# Allegro board PCB_SQ_WAVE_GEN1_BACKUP_cu_plan_masa_v1.brd
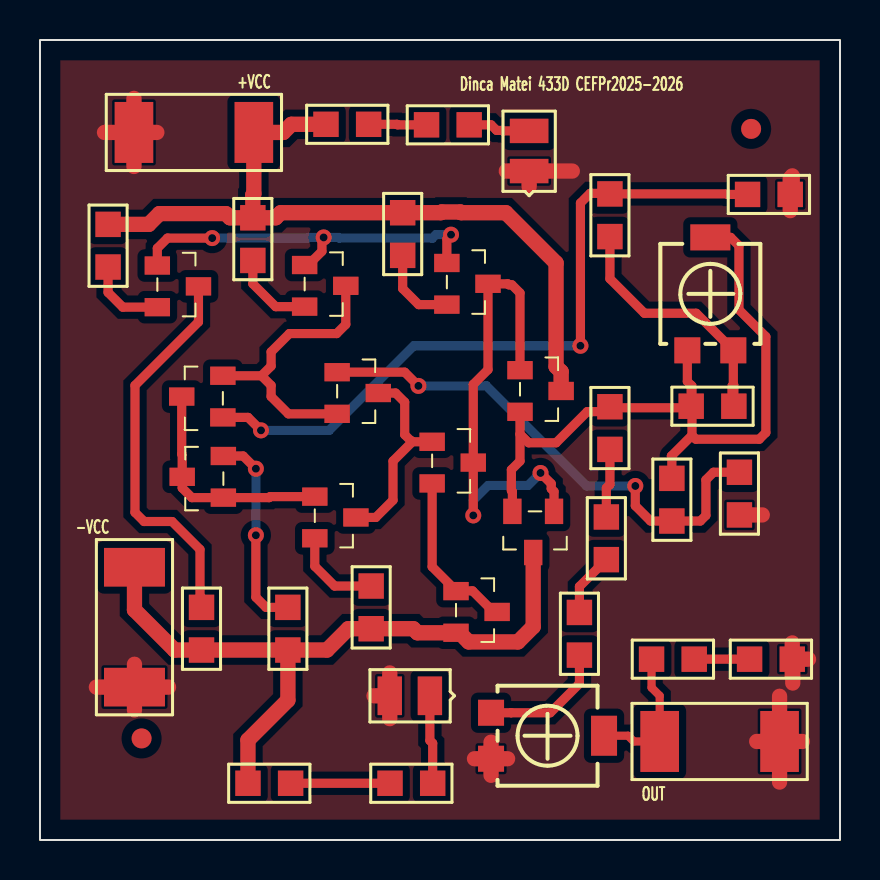
[diagram p0: board, top side]
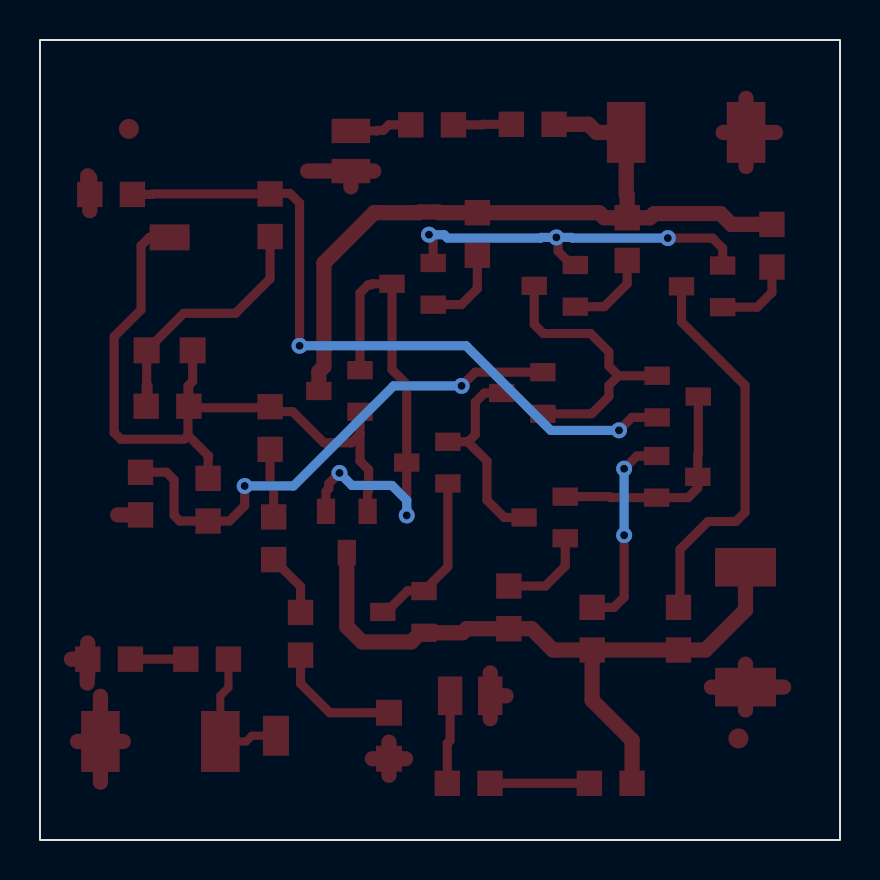
[diagram p1: board, bottom side, seen from below]

Outline 40.01 x 40.01 mm; copper layers: TOP, BOTTOM. Coordinates in mm from the lower left corner of the outline.
Outline path: rectangle 0,0 40.01,40.01

## Design rules (mm)
nets with their own width: min track width 0.406; nets OUT
nets with their own width: min track width 0.457; nets N00196 N00263 N00461 N00465 N00582 N00656 N00664 N00816 N001171 N002571 N003431 N006202 N006502 N57934 N58090 N58432 N58438 N58506 N58998 N59070 N579021 N581041 N589401 N589621
nets with their own width: min track width 0.762; nets +VCC -VCC GND

## Placement (name value [footprint] x y rotation side)
C1  10n  [SMC0805]  37.52 32.28 180 top
D2  5V,LED,LED  [SMD0805]  24.46 33.45 90 top
D3  5V,LED,LED  [SMD0805]  19.5 7.21 180 top
J1  CON2  [SMR2512]  4.7 35.38 0 top
J2  CON2  [SMR2512]  4.72 7.65 90 top
J3  CON2  [SMR2512]  30.99 4.93 0 top
NOREF  -  [unnamed]  35.56 35.56 0 top
NOREF#2  -  [unnamed]  5.08 5.08 0 top
NOREF#3  -  [#2]  40.01 0 90 top
NOREF#4  -  [#2]  0 40.01 0 top
POT1  10k  [TS53YL]  22.56 4.06 180 top
POT2  10k  [TS53YL]  34.67 24.49 270 top
Q1  PNP BCE  [TO236AA]  5.87 28.73 180 top
Q2  PNP BCE  [TO236AA]  13.23 28.75 180 top
Q3  PNP BCE  [TO236AA]  20.35 28.85 180 top
Q4  PNP BCE  [TO236AA]  9.14 21.13 0 top
Q5  PNP BCE  [TO236AA]  14.86 23.39 180 top
Q6  NPN BCE  [TO236AA]  9.17 17.12 0 top
Q7  NPN BCE  [TO236AA]  13.74 17.17 180 top
Q8  NPN BCE  [TO236AA]  19.61 19.91 180 top
Q9  NPN BCE  [TO236AA]  24 23.5 180 top
Q10  PNP BCE  [TO236AA]  25.7 16.43 90 top
Q11  NPN BCE  [TO236AA]  20.8 12.45 180 top
R1  100  [SMR0805]  3.4 30.78 270 top
R2  100  [SMR0805]  10.64 31.11 270 top
R3  100  [SMR0805]  18.14 31.37 270 top
R4  22k  [SMR0805]  8.08 11.63 270 top
R5  100  [SMR0805]  12.4 11.63 270 top
R6  100  [SMR0805]  16.56 12.7 270 top
R7  1k  [SMR0805]  28.5 32.31 270 top
R8  10k  [SMR0805]  34.7 21.69 180 top
R9  220  [SMR0805]  16.43 35.79 180 top
R10  22k  [SMR0805]  28.5 19.53 90 top
R11  10k  [SMR0805]  31.6 15.95 90 top
R12  10k  [SMR0805]  34.98 16.26 90 top
R13  6.8k  [SMR0805]  28.32 14.02 90 top
R14  51  [SMR0805]  21.46 35.76 180 top
R15  2.2k  [SMR0805]  26.97 9.25 90 top
R16  220  [SMR0805]  12.53 2.84 180 top
R17  51  [SMR0805]  19.64 2.84 180 top
RL1  1k  [SMR0805]  37.62 9.04 180 top
RL2  10k  [SMR0805]  32.72 9.04 180 top

## Library data of the parts
C1 = C
D2 D3 = LED_1
J1-J3 = CON2
POT1 POT2 = POT
Q1-Q5 Q10 = PNP BCE_1
Q6-Q9 Q11 = NPN BCE_0
R1-R17 RL1 RL2 = R

## Footprints (pads in the part's own frame, mm; a bottom-side part is the same pattern mirrored in y, then rotated)
SMC0805
  rect 1.27x1.27 smd: 1(0,0) 2(2.134,0)
SMD0805
  rect 1.219x1.93 smd: A(2.007,0) C(0,0)
SMR0805
  rect 1.27x1.27 smd: 1(0,0) 2(2.134,0)
SMR2512
  rect 1.93x3.048 smd: 1(0,0) 2(5.994,0)
TO236AA
  rect 1.27x0.914 smd: 1(0,0) 2(0,2.083) 3(-2.057,1.041)
TS53YL
  rect 1.3x1.3 smd: 1(0,0) 3(0,-2.3)
  rect 1.3x2 smd: 2(-5.65,-1.15)
unnamed
  round 1 smd: (0,0)

## Nets
+VCC: J1.2 Q9.3 R1.1 R2.1 R3.1 R9.2
-VCC: J2.2 Q10.3 Q11.2(E) R4.2 R5.2 R6.2 R16.2
GND: C1.1 D2.C D3.A J1.1 J2.1 J3.2 POT1.1 R12.1 RL1.1
OUT: J3.1 POT1.2(T) RL2.2
N00196: Q1.3 R4.1
N00263: Q1.1 Q2.1 Q3.1
N00461: Q3.3 Q8.3 Q9.1 Q10.1
N00465: Q8.2(E) Q11.1 Q11.3
N00582: Q2.3 Q4.2(E) Q5.2(E)
N00656: Q4.3 Q6.1 Q6.3 Q7.1
N00664: Q5.3 Q7.3 Q8.1
N00816: POT2.2(T) POT2.3 Q9.2(E) Q10.2(E) R8.2 R10.2 R11.2
N001171: Q1.2(E) R1.2
N002571: Q3.2(E) R3.2
N003431: Q2.2(E) R2.2
N006202: Q7.2(E) R6.1
N006502: Q6.2(E) R5.1
N57934: D2.A R14.1
N58090: R16.1 R17.2
N58432: C1.2 Q4.1 R7.1
N58438: Q5.1 R11.1 R12.2
N58506: POT2.1 R7.2 R8.1
N58998: POT1.3 R15.1
N59070: RL1.2 RL2.1
N579021: R9.1 R14.2
N581041: D3.C R17.1
N589401: R10.1 R13.2
N589621: R13.1 R15.2

## Via types
v1: diameter 0.8, hole 0.4, TOP to BOTTOM, 11 vias

## Routing (per net, layer and track width the routed paths; a pad name or vN(x,y) marks a point on that pad's centre or on a via; arc(x,y) is an arc through that point)
+VCC: length 38.5
  TOP w0.762: R1.1 5.44,30.78 5.97,31.32 9.29,31.32 9.5,31.11 R2.1 ; Q9.3 26.06,23.42 25.81,23.67 25.81,28.85 23.29,31.37 21.06,31.37 21.02,31.41 20.08,31.41 20.05,31.37 R3.1 12.04,31.37 11.79,31.11 R2.1 ; R2.1 10.64,32.26 10.69,32.31 J1.2 12.17,35.38 12.57,35.79 R9.2
-VCC: length 35.1
  TOP w0.762: R5.2 R4.2 6.73,9.5 4.72,11.51 J2.2 ; R5.2 14.35,9.5 15.42,10.57 R6.2 18.67,10.57 18.87,10.36 Q11.2 20.98,10.36 21.44,9.91 23.9,9.91 24.66,10.67 Q10.3 ; R5.2 12.4,6.99 10.4,5 R16.2
GND: length 36.9
  TOP w0.762: POT1.1 22.56,4.89 ; POT1.1 22.28,4.34 ; POT1.1 22.56,3.24 ; POT1.1 23.38,4.06 ; POT1.1 21.73,4.06 ; J2.1 6.43,7.65 ; J2.1 4.72,8.79 ; J2.1 4.72,6.5 ; J2.1 2.82,7.65 ; RL1.1 37.62,9.86 ; RL1.1 38.43,9.04 ; RL1.1 37.64,9.02 37.64,7.85 ; RL1.1 37.62,8.23 ; 36.98,7.19 J3.2 ; J3.2 36.98,2.9 ; J3.2 35.84,4.93 ; J3.2 38.13,4.93 ; J1.1 4.7,37.08 ; J1.1 4.7,33.68 ; J1.1 3.23,35.38 ; J1.1 5.84,35.38 ; 23.32,33.45 D2.C ; D2.C 26.62,33.45 ; D2.C 24.46,32.66 ; 37.62,33.21 37.62,32.23 37.57,32.28 C1.1 ; C1.1 37.52,33.1 ; C1.1 37.52,31.47 ; 16.7,7.21 D3.A ; D3.A 17.49,6.07 ; D3.A 17.49,8.35 ; R12.1 36.12,16.26
OUT: length 7.2
  TOP w0.406: POT1.2 29.41,5.21 29.69,4.93 J3.1 30.99,7.21 30.58,7.62 RL2.2
N00196: length 20.4
  TOP w0.457: R4.1 8.08,12.12 8.05,12.14 ; 8.05,11.31 8.05,12.14 ; 8.05,12.14 8,12.19 8,14.53 6.6,15.93 5.21,15.93 4.75,16.38 4.75,22.73 7.92,25.91 Q1.3
N00263: length 19.2
  TOP w0.457: Q3.1 20.35,30.06 v1(20.55,30.27) ; Q1.1 5.87,29.59 6.38,30.1 v1(8.61,30.1) ; v1(14.18,30.13) 14.1,30.05 14.1,29.44 13.41,28.75 Q2.1
  BOTTOM w0.457: v1(20.55,30.27) 19.8,30.27 19.63,30.1 14.97,30.1 14.94,30.13 v1(14.18,30.13) 13.43,30.13 13.39,30.1 v1(8.61,30.1)
N00461: length 24.4
  TOP w0.457: v1(25.03,18.35) 25.56,17.82 25.56,17.57 25.7,17.42 Q10.1 ; Q9.1 24,27.36 23.6,27.76 23.44,27.76 23.39,27.81 Q3.3 22.4,23.52 21.67,22.78 Q8.3 v1(21.67,16.23)
  BOTTOM w0.457: v1(25.03,18.35) 24.4,17.73 22.41,17.73 21.67,16.99 v1(21.67,16.23)
N00465: length 8.4
  TOP w0.457: Q8.2 19.61,13.67 20.82,12.46 ; 20.82,12.46 21.63,12.46 22.68,11.4 Q11.3 ; 20.82,12.46 Q11.1
N00582: length 14.5
  TOP w0.457: 11.07,23.22 11.56,23.7 11.56,24.41 12.47,25.32 14.83,25.32 15.29,25.78 Q2.3 ; 11.07,23.22 11.56,22.73 11.56,22.17 12.42,21.31 Q5.2 ; 11.07,23.22 Q4.2
N00656: length 11.4
  TOP w0.457: Q7.1 11.51,17.17 11.46,17.12 Q6.1 7.59,17.12 7.11,17.6 Q6.3 7.11,19.27 7.09,19.29 Q4.3
N00664: length 10.2
  TOP w0.457: 18.62,19.91 18.57,19.96 18.54,19.96 18.24,20.27 18.24,21.89 17.78,22.35 Q5.3 ; 18.62,19.91 17.65,18.95 17.65,16.99 16.79,16.13 Q7.3 ; 18.62,19.91 Q8.1
N00816: length 38.4
  TOP w0.457: Q10.2 23.62,17.42 23.57,17.48 23.57,18.52 24,18.95 24,20.29 ; 32.56,22.74 32.6,22.7 32.6,21.62 ; 32.56,22.74 32.37,22.93 POT2.3 ; 32.56,22.74 R8.2 ; 24,20.29 24.43,19.86 25.81,19.86 27.37,21.42 28.73,21.42 ; 24,20.29 Q9.2 ; POT2.2 34.53,30.14 34.95,29.72 34.95,26.52 36.3,25.17 36.3,20.37 35.97,20.04 32.8,20.04 32.6,20.23 ; 28.73,21.42 28.92,21.62 32.6,21.62 ; 28.73,21.42 28.5,21.65 R10.2 ; 32.6,20.23 31.57,19.2 31.6,19.18 R11.2 ; 32.6,20.23 32.6,21.62
N001171: length 4
  TOP w0.457: R1.2 3.4,27.38 4.14,26.64 Q1.2
N002571: length 4.2
  TOP w0.457: R3.2 18.14,27.57 18.93,26.77 Q3.2
N003431: length 4.2
  TOP w0.457: R2.2 10.64,27.81 11.79,26.67 Q2.2
N006202: length 4.6
  TOP w0.457: Q7.2 13.74,13.69 14.73,12.7 R6.1
N006502: length 10.1
  TOP w0.457: v1(10.79,15.24) 10.79,12.14 11.3,11.63 R5.1 ; Q6.2 10.16,19.2 v1(10.79,18.57)
  BOTTOM w0.457: v1(10.79,15.24) v1(10.79,18.57)
N57934: length 3.1
  TOP w0.457: R14.1 22.56,35.76 22.83,35.48 23.11,35.48 23.14,35.46 D2.A
N58090: length 5
  TOP w0.457: R17.2 R16.1
N58432: length 35.9
  TOP w0.457: 35.11,32.28 35.28,32.45 ; 35.11,32.28 34.39,32.28 34.37,32.31 R7.1 28.47,32.33 27.51,32.33 27.03,31.85 v1(27.03,24.71) ; 35.11,32.28 C1.2 ; v1(11.05,20.49) 10.4,21.13 Q4.1
  BOTTOM w0.457: v1(11.05,20.49) 14.47,20.49 18.69,24.71 v1(27.03,24.71)
N58438: length 25.8
  TOP w0.457: Q5.1 18.24,23.39 v1(18.92,22.71) ; v1(29.77,17.7) 29.77,16.72 30.53,15.95 R11.1 33.02,15.95 33.3,16.23 33.3,18.01 33.68,18.39 R12.2
  BOTTOM w0.457: v1(18.92,22.71) 22.33,22.71 27.33,17.7 v1(29.77,17.7)
N58506: length 13.7
  TOP w0.457: 34.6,21.62 34.6,22.7 34.67,22.76 ; R8.1 34.7,22.74 34.67,22.76 ; 34.67,22.76 POT2.1 32.82,26.34 30.23,26.34 28.5,28.07 R7.2
N58998: length 6.4
  TOP w0.457: POT1.3 23.56,6.36 23.56,6.36 25.51,6.36 26.97,7.82 R15.1
N59070: length 2.9
  TOP w0.457: RL2.1 RL1.2 35.6,9.04
N579021: length 2.9
  TOP w0.457: R9.1 17.85,35.79 17.88,35.76 R14.2
N581041: length 4.4
  TOP w0.457: R17.1 19.64,4.84 19.5,4.98 D3.C
N589401: length 3.5
  TOP w0.457: R13.2 28.32,17.6 28.5,17.78 R10.1
N589621: length 3.3
  TOP w0.457: 26.97,11.26 R15.2 26.97,12.67 R13.1

## Copper pours and planes (outline as drawn; the poured copper is in the pictures)
GND on TOP: 1.02,1.02 1.02,38.99 38.99,38.99 38.99,1.02 ; 11 cut-outs

## Text on the board
Ref Des/Silkscreen Top: -VCC | +VCC | Dinca Matei 433D CEFPr2025-2026 | OUT
XSECTION_CHART: *  SURFACE - AIR 0 MIL | L1 TOP CONDUCTOR - COPPER 0.709 MIL | *  DIELECTRIC - FR-4 61.575 MIL | L2 BOTTOM CONDUCTOR - COPPER 0.709 MIL | DESIGN CROSS SECTION CHART | ___________________________ | TOTAL THICKNESS 62.993 MIL | 1-2
DIMENSION: FIGURE | FINISHED_SIZE | 15.75 | DRILL CHART: TOP to BOTTOM | ALL UNITS ARE IN MILS | PLATED | QTY | 11
